# Altium PCB LCC_PCB.PcbDoc (part 1 of 2)
Units mm, origin at the board's own origin, x right, y up, seen from the top; angles counter-clockwise.
Board outline 253 x 208 mm, 4 copper layers (Top Layer, Layer 1, Layer 2, Bottom Layer), stack 0.603 mm thick; 172 components, 110 nets, 492 pads, 79 vias.
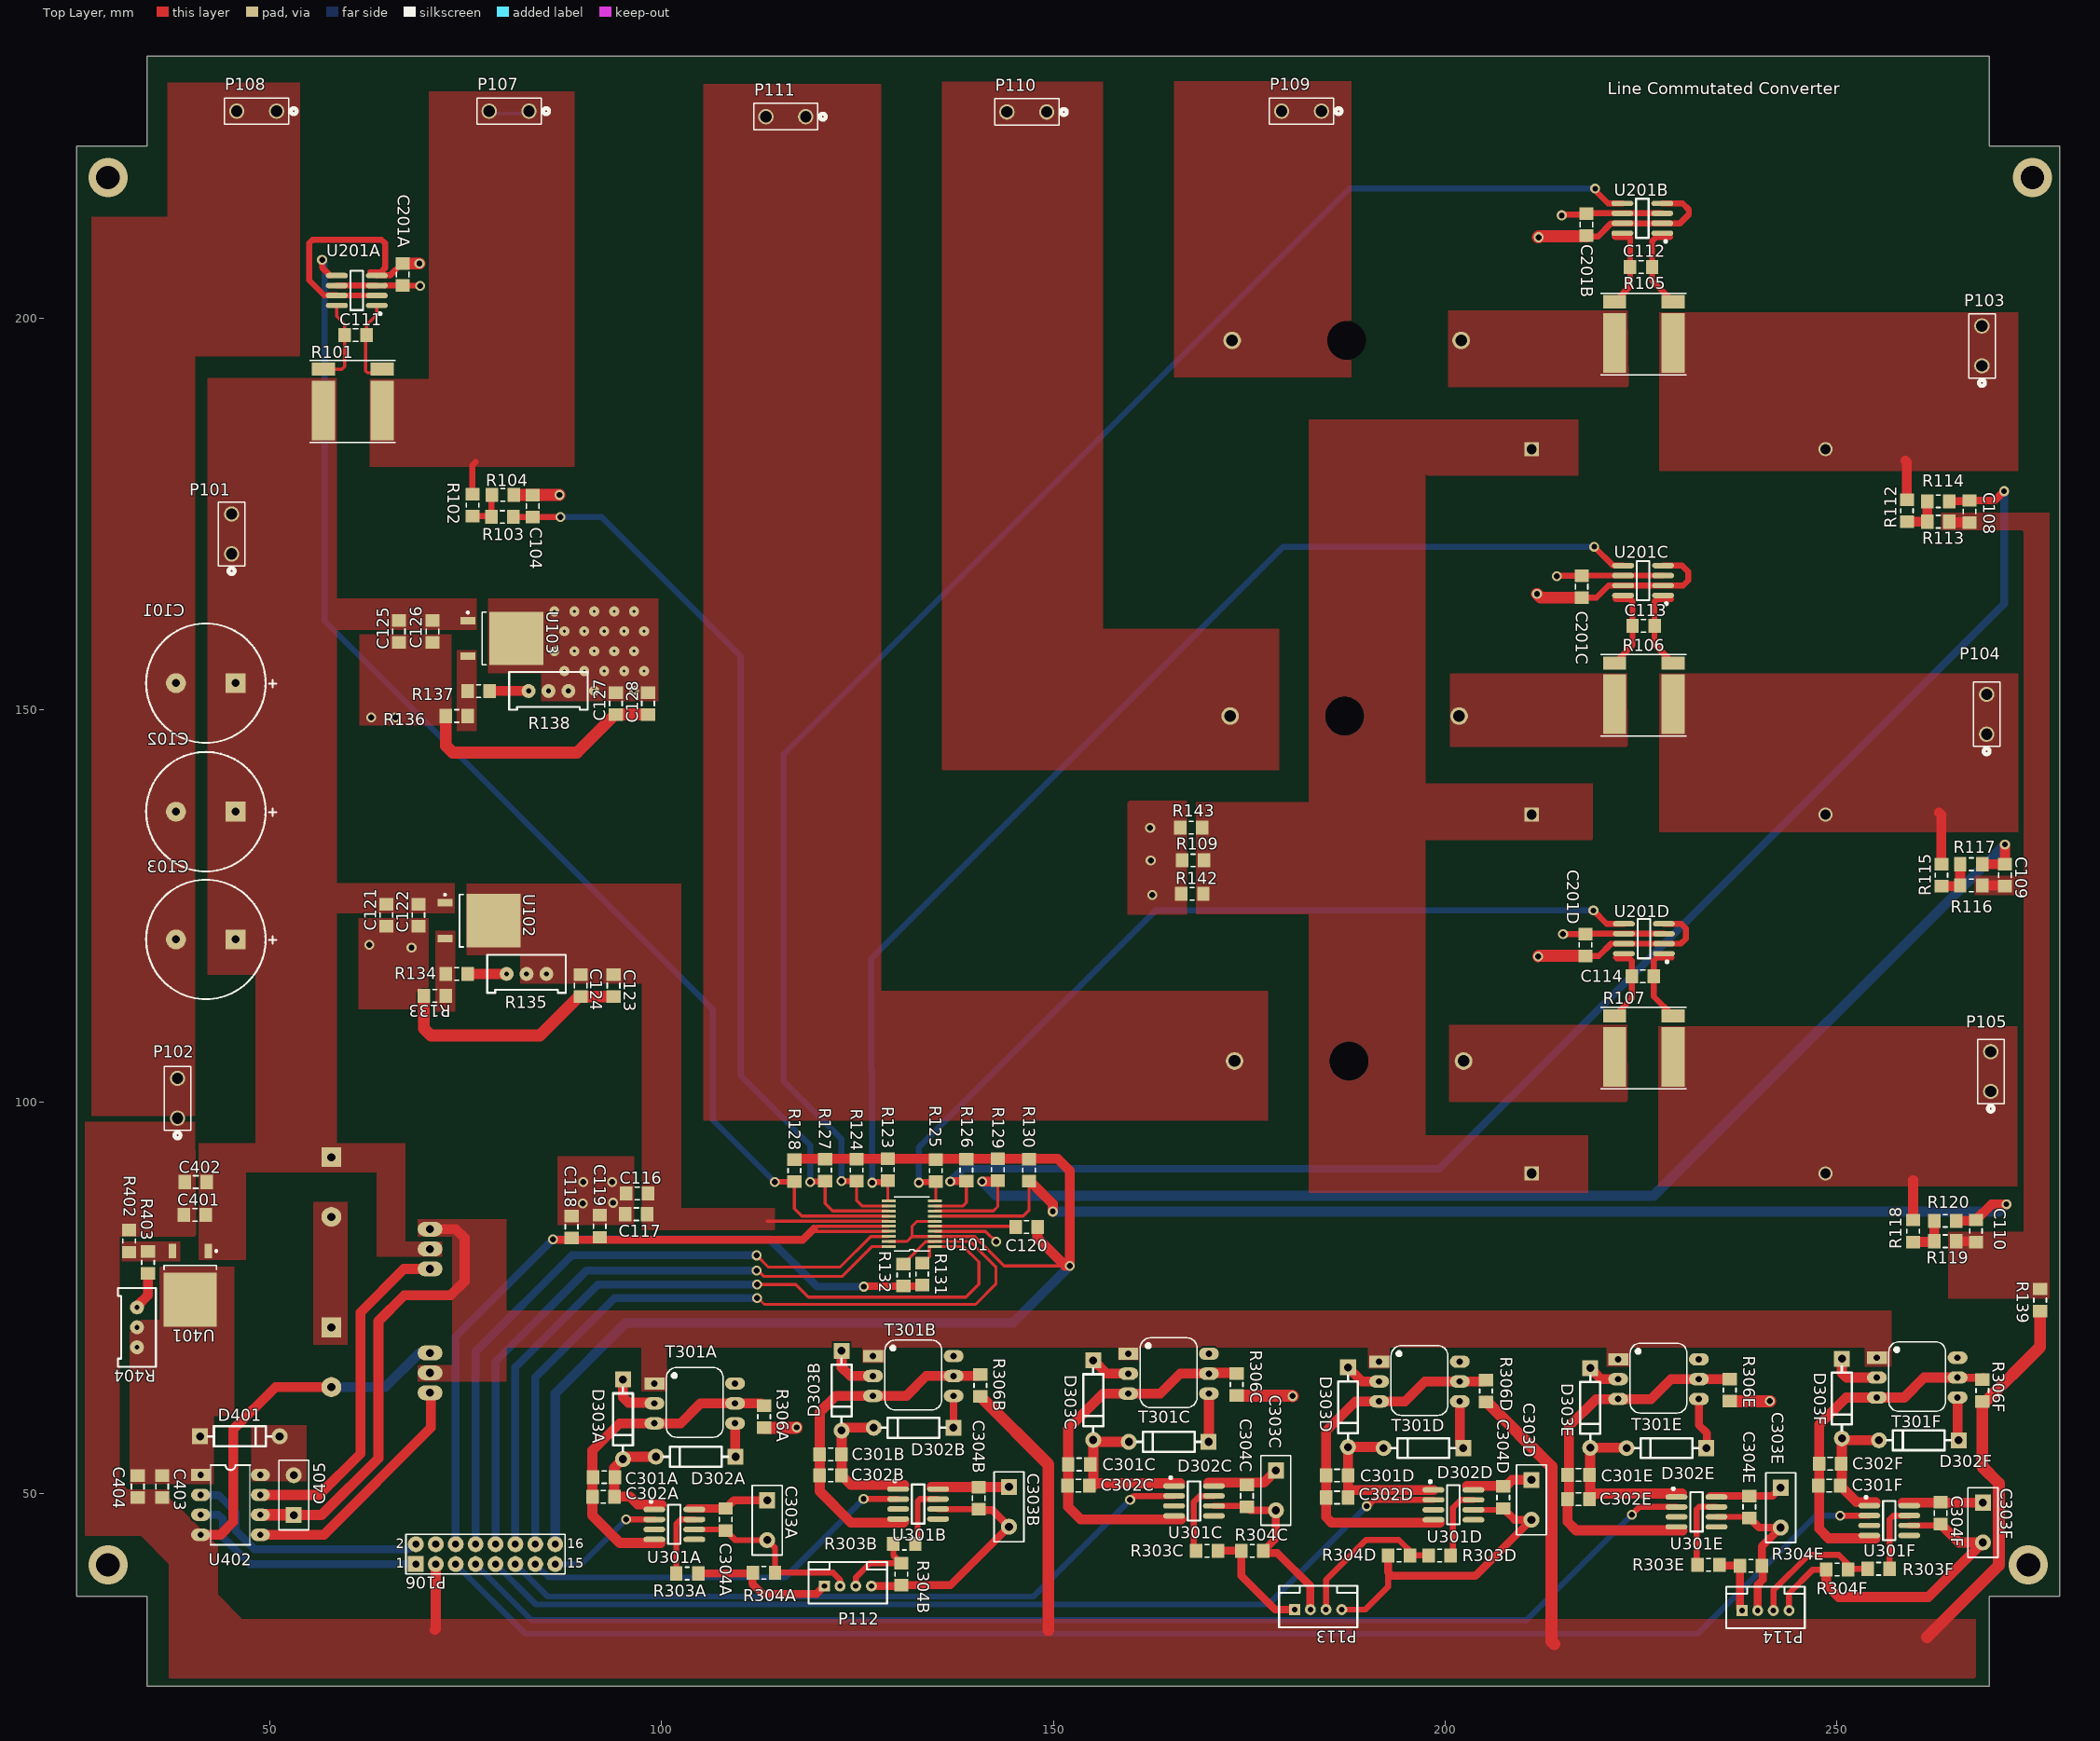
[diagram p0: Top Layer view]
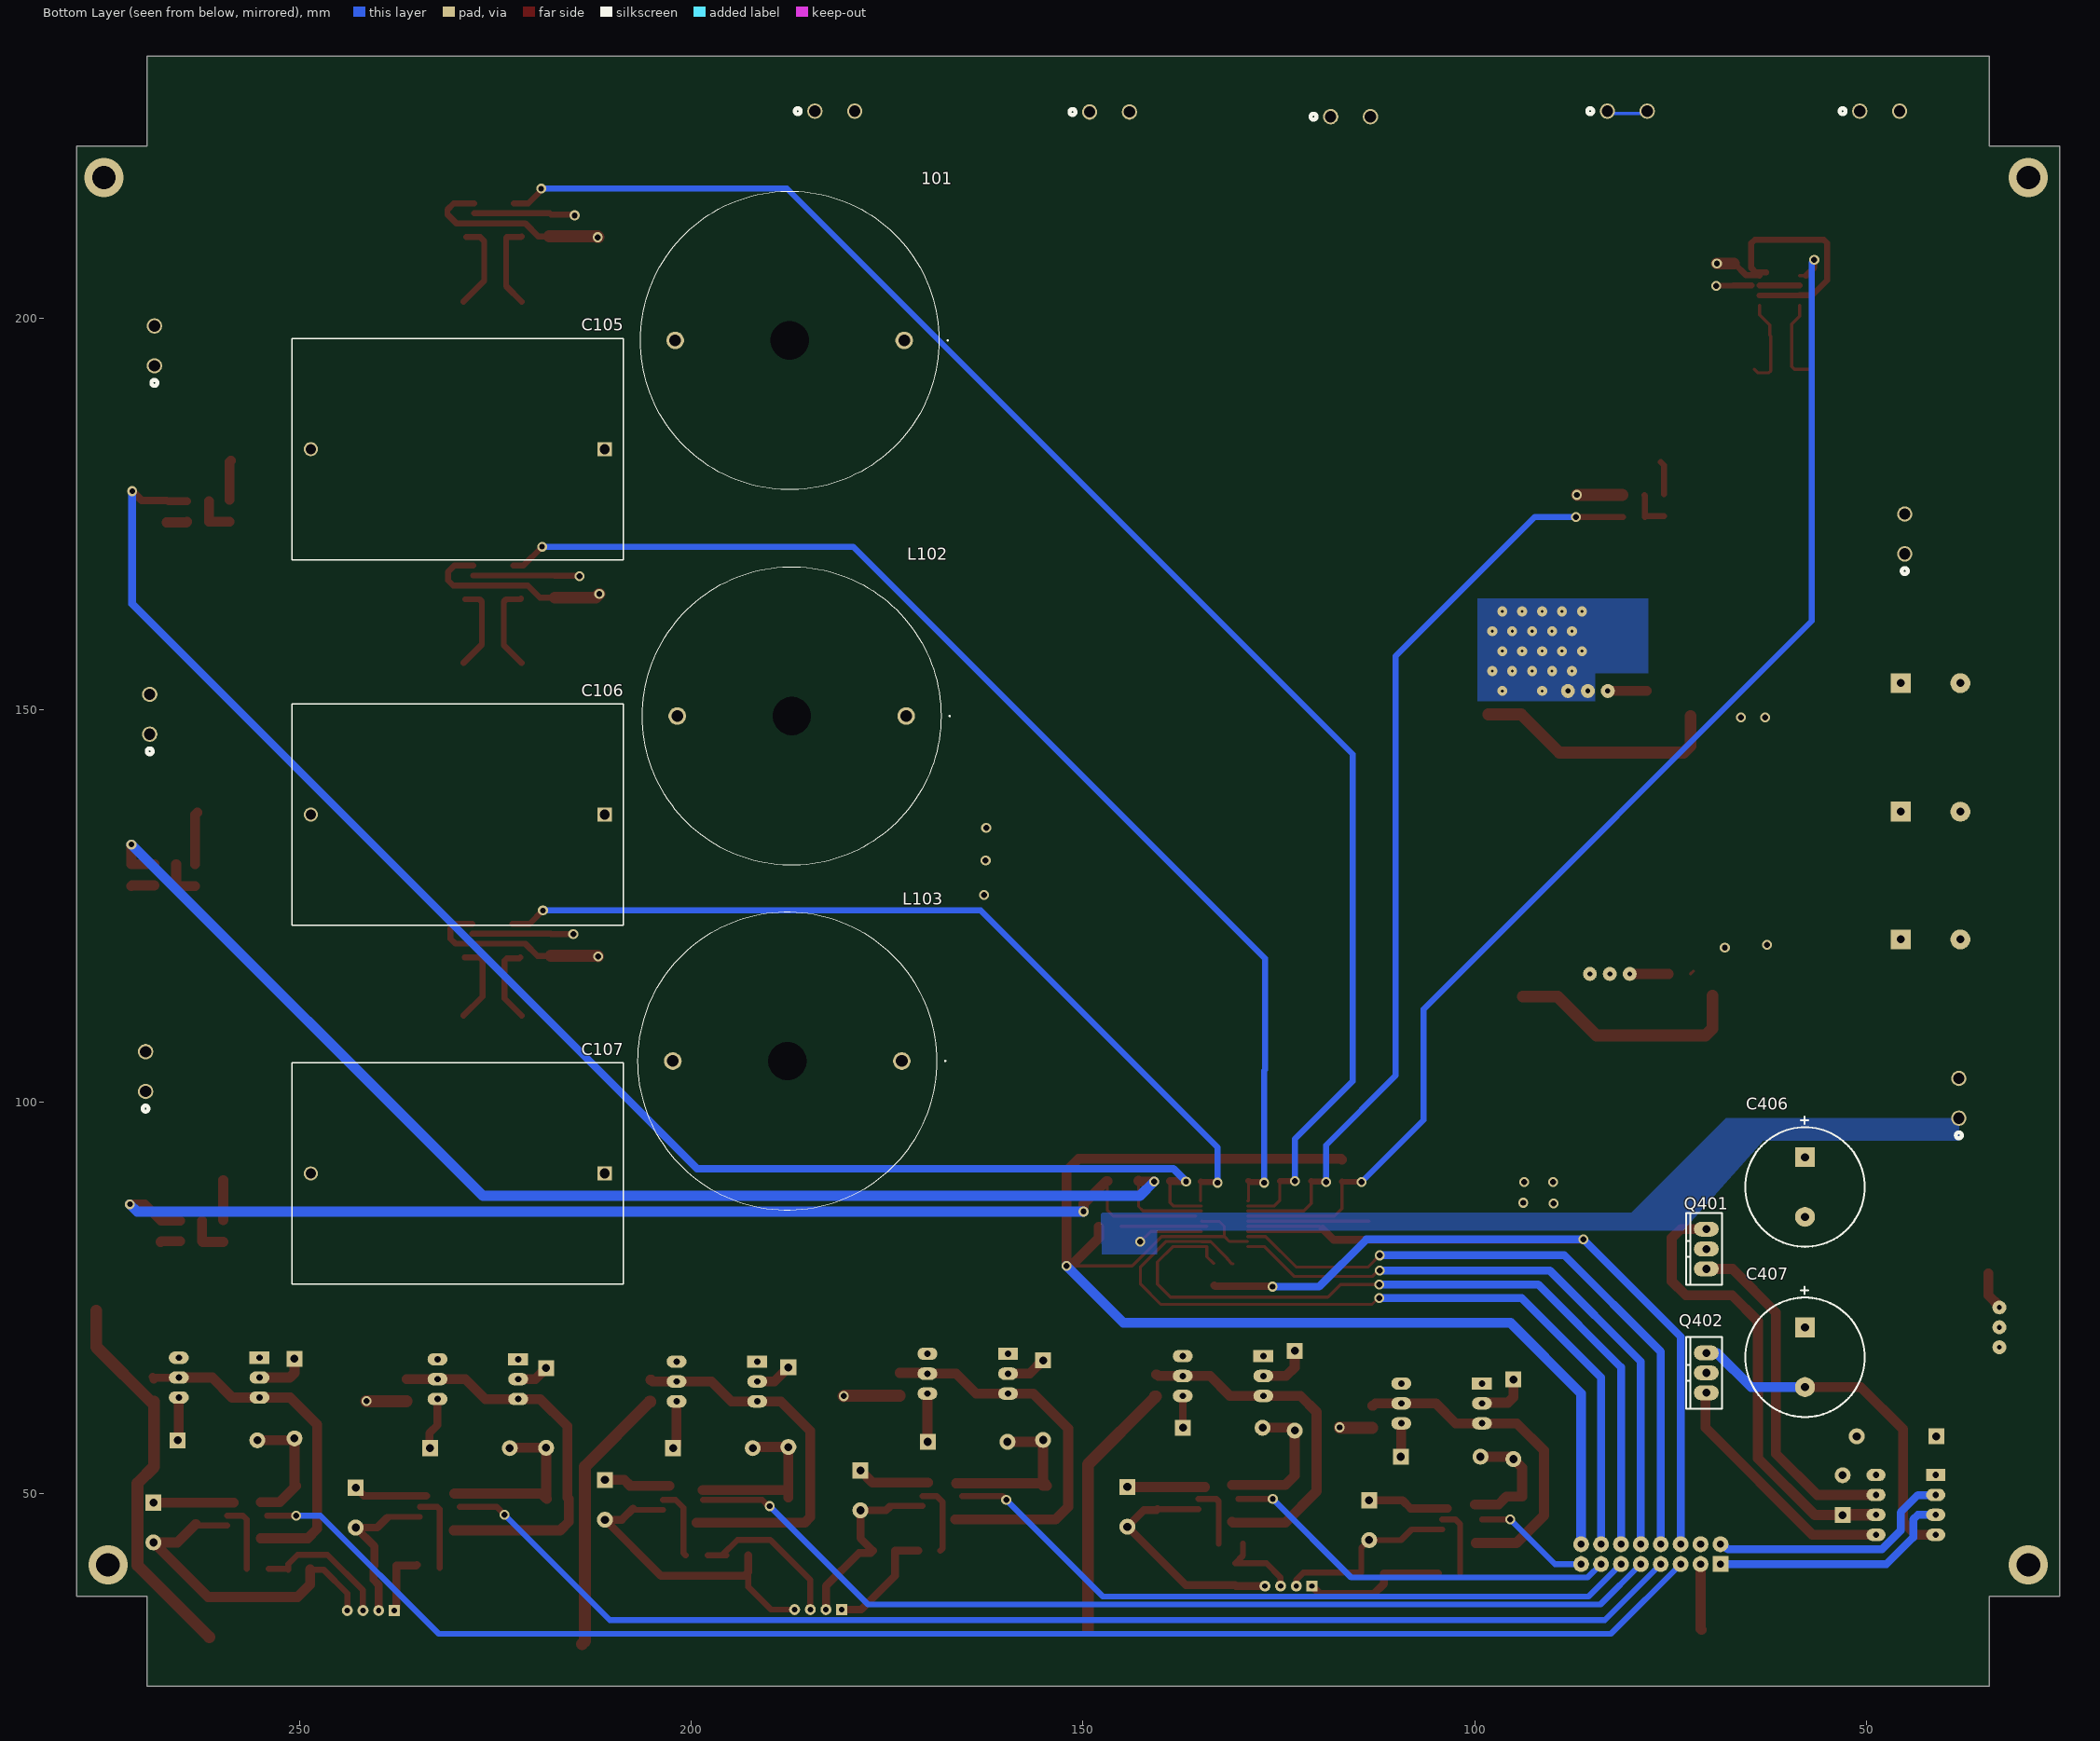
[diagram p1: Bottom Layer view, seen from below]
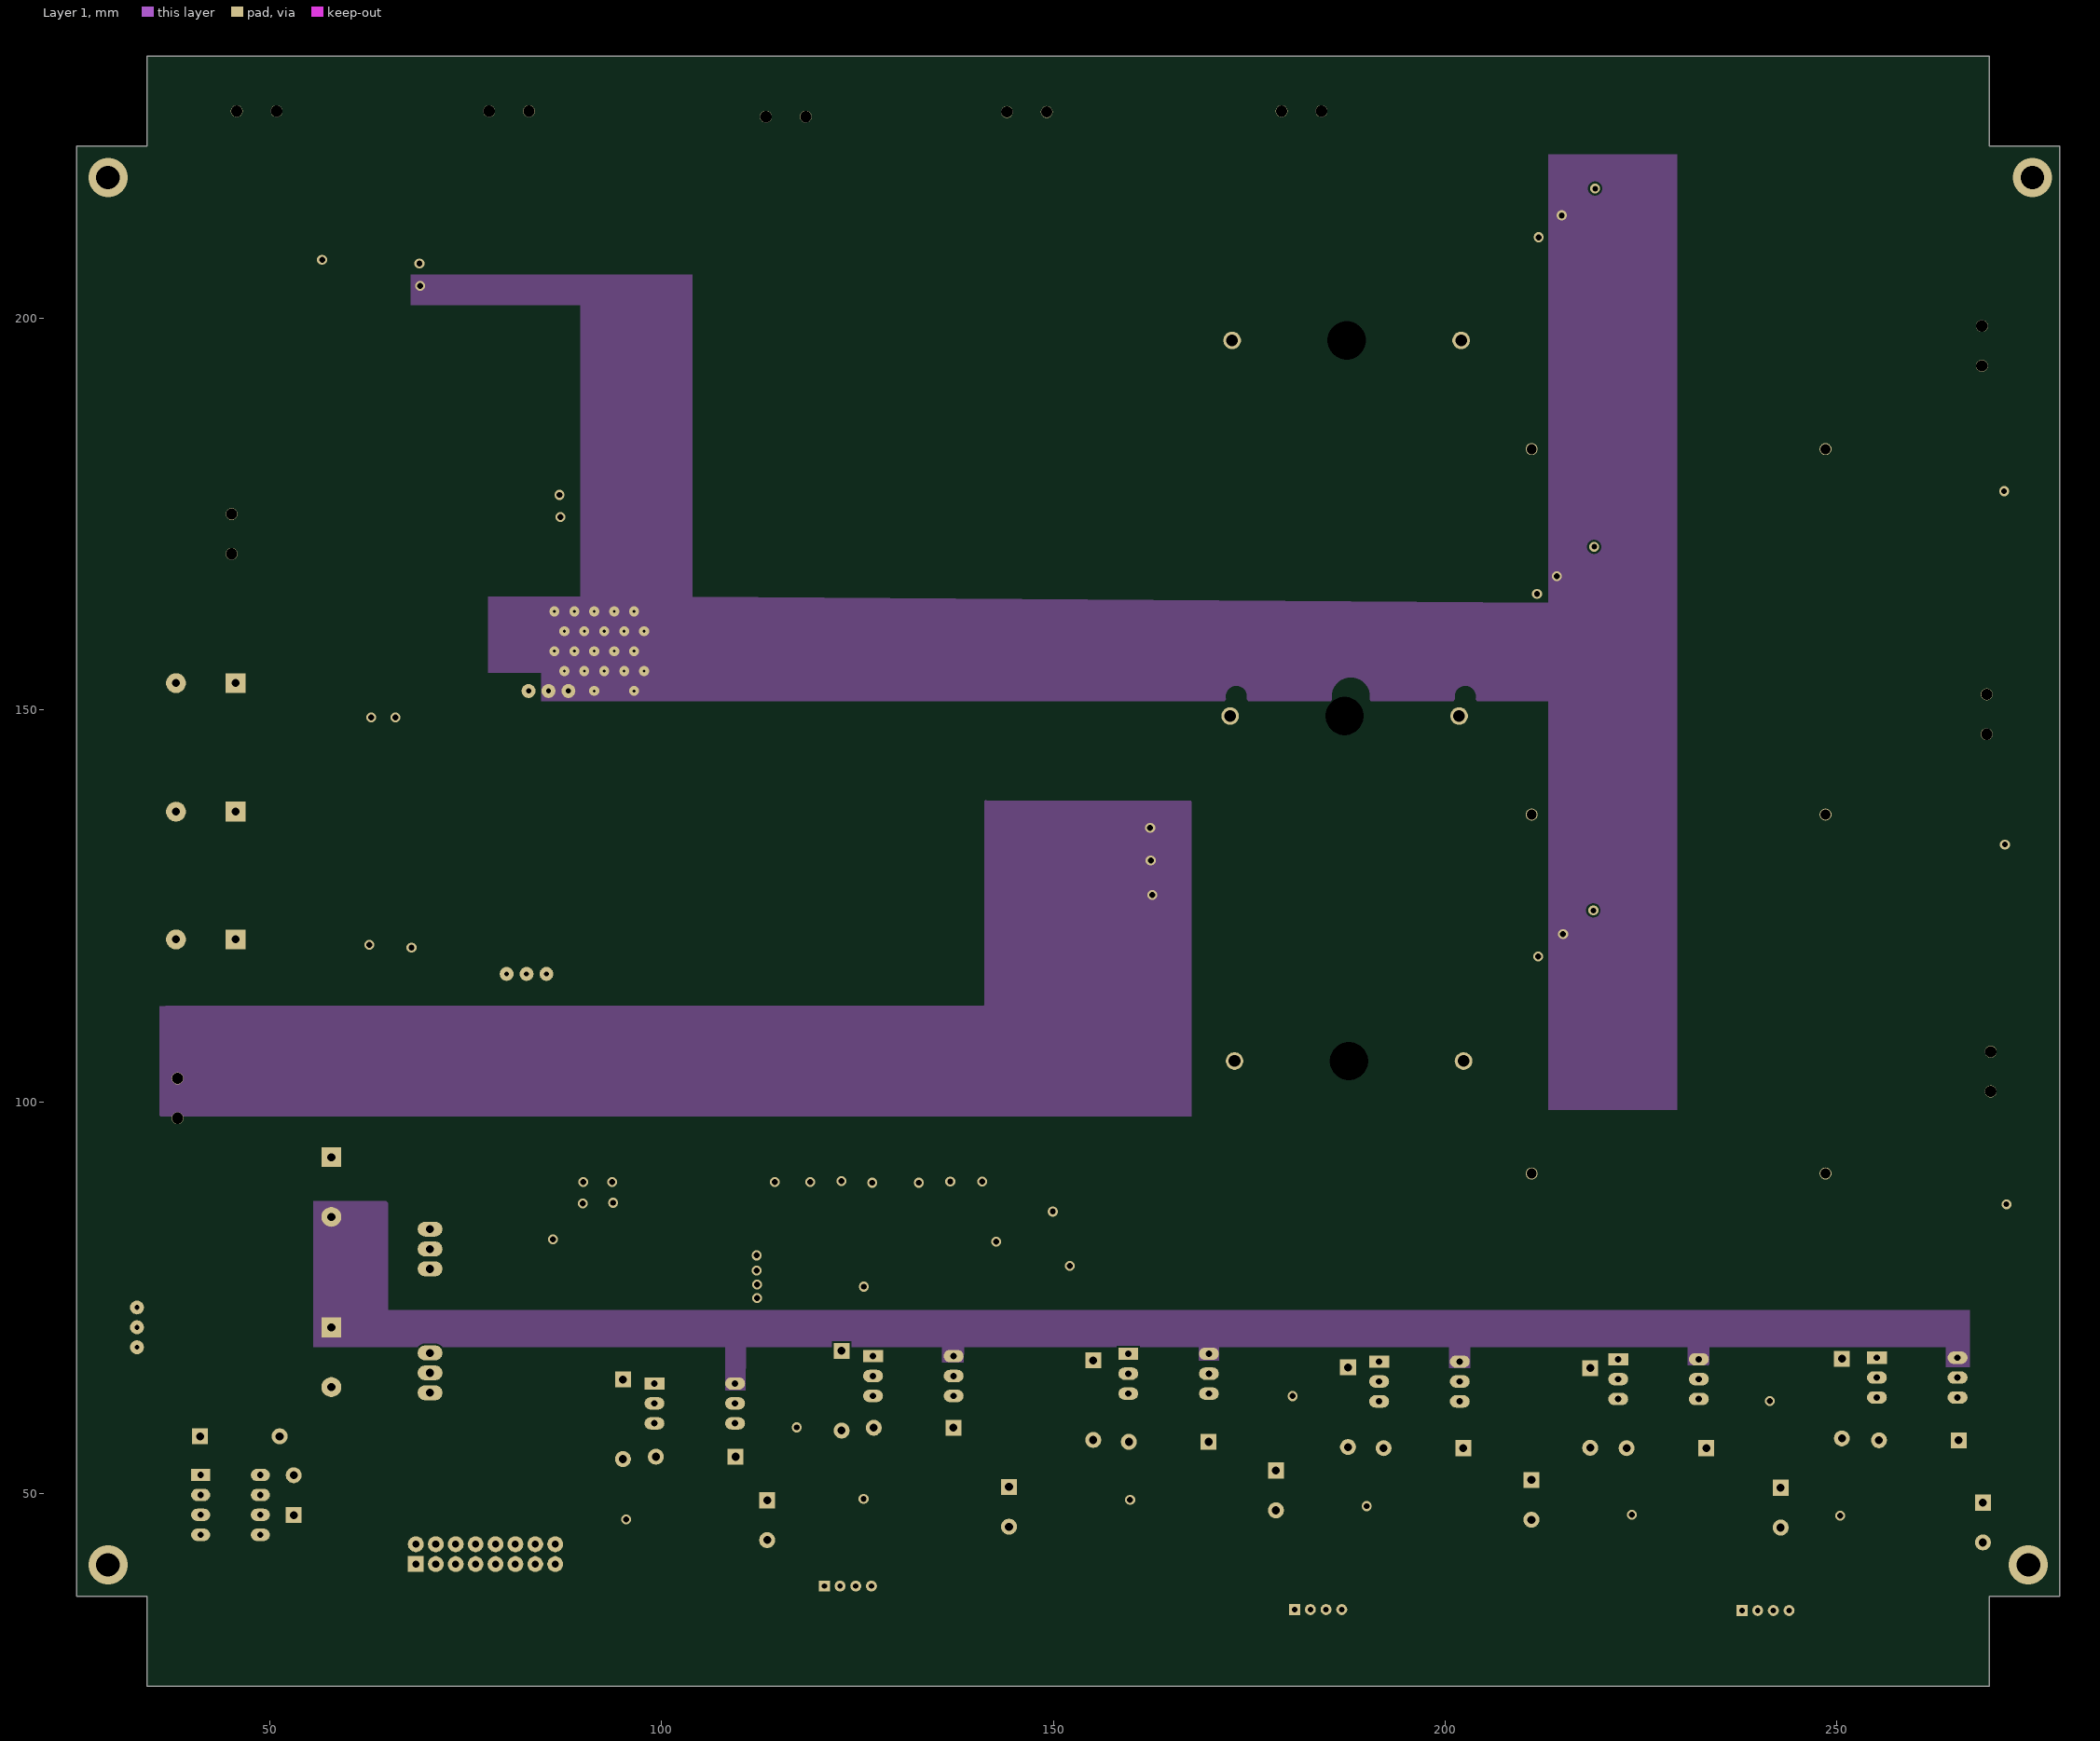
[diagram p2: Layer 1]
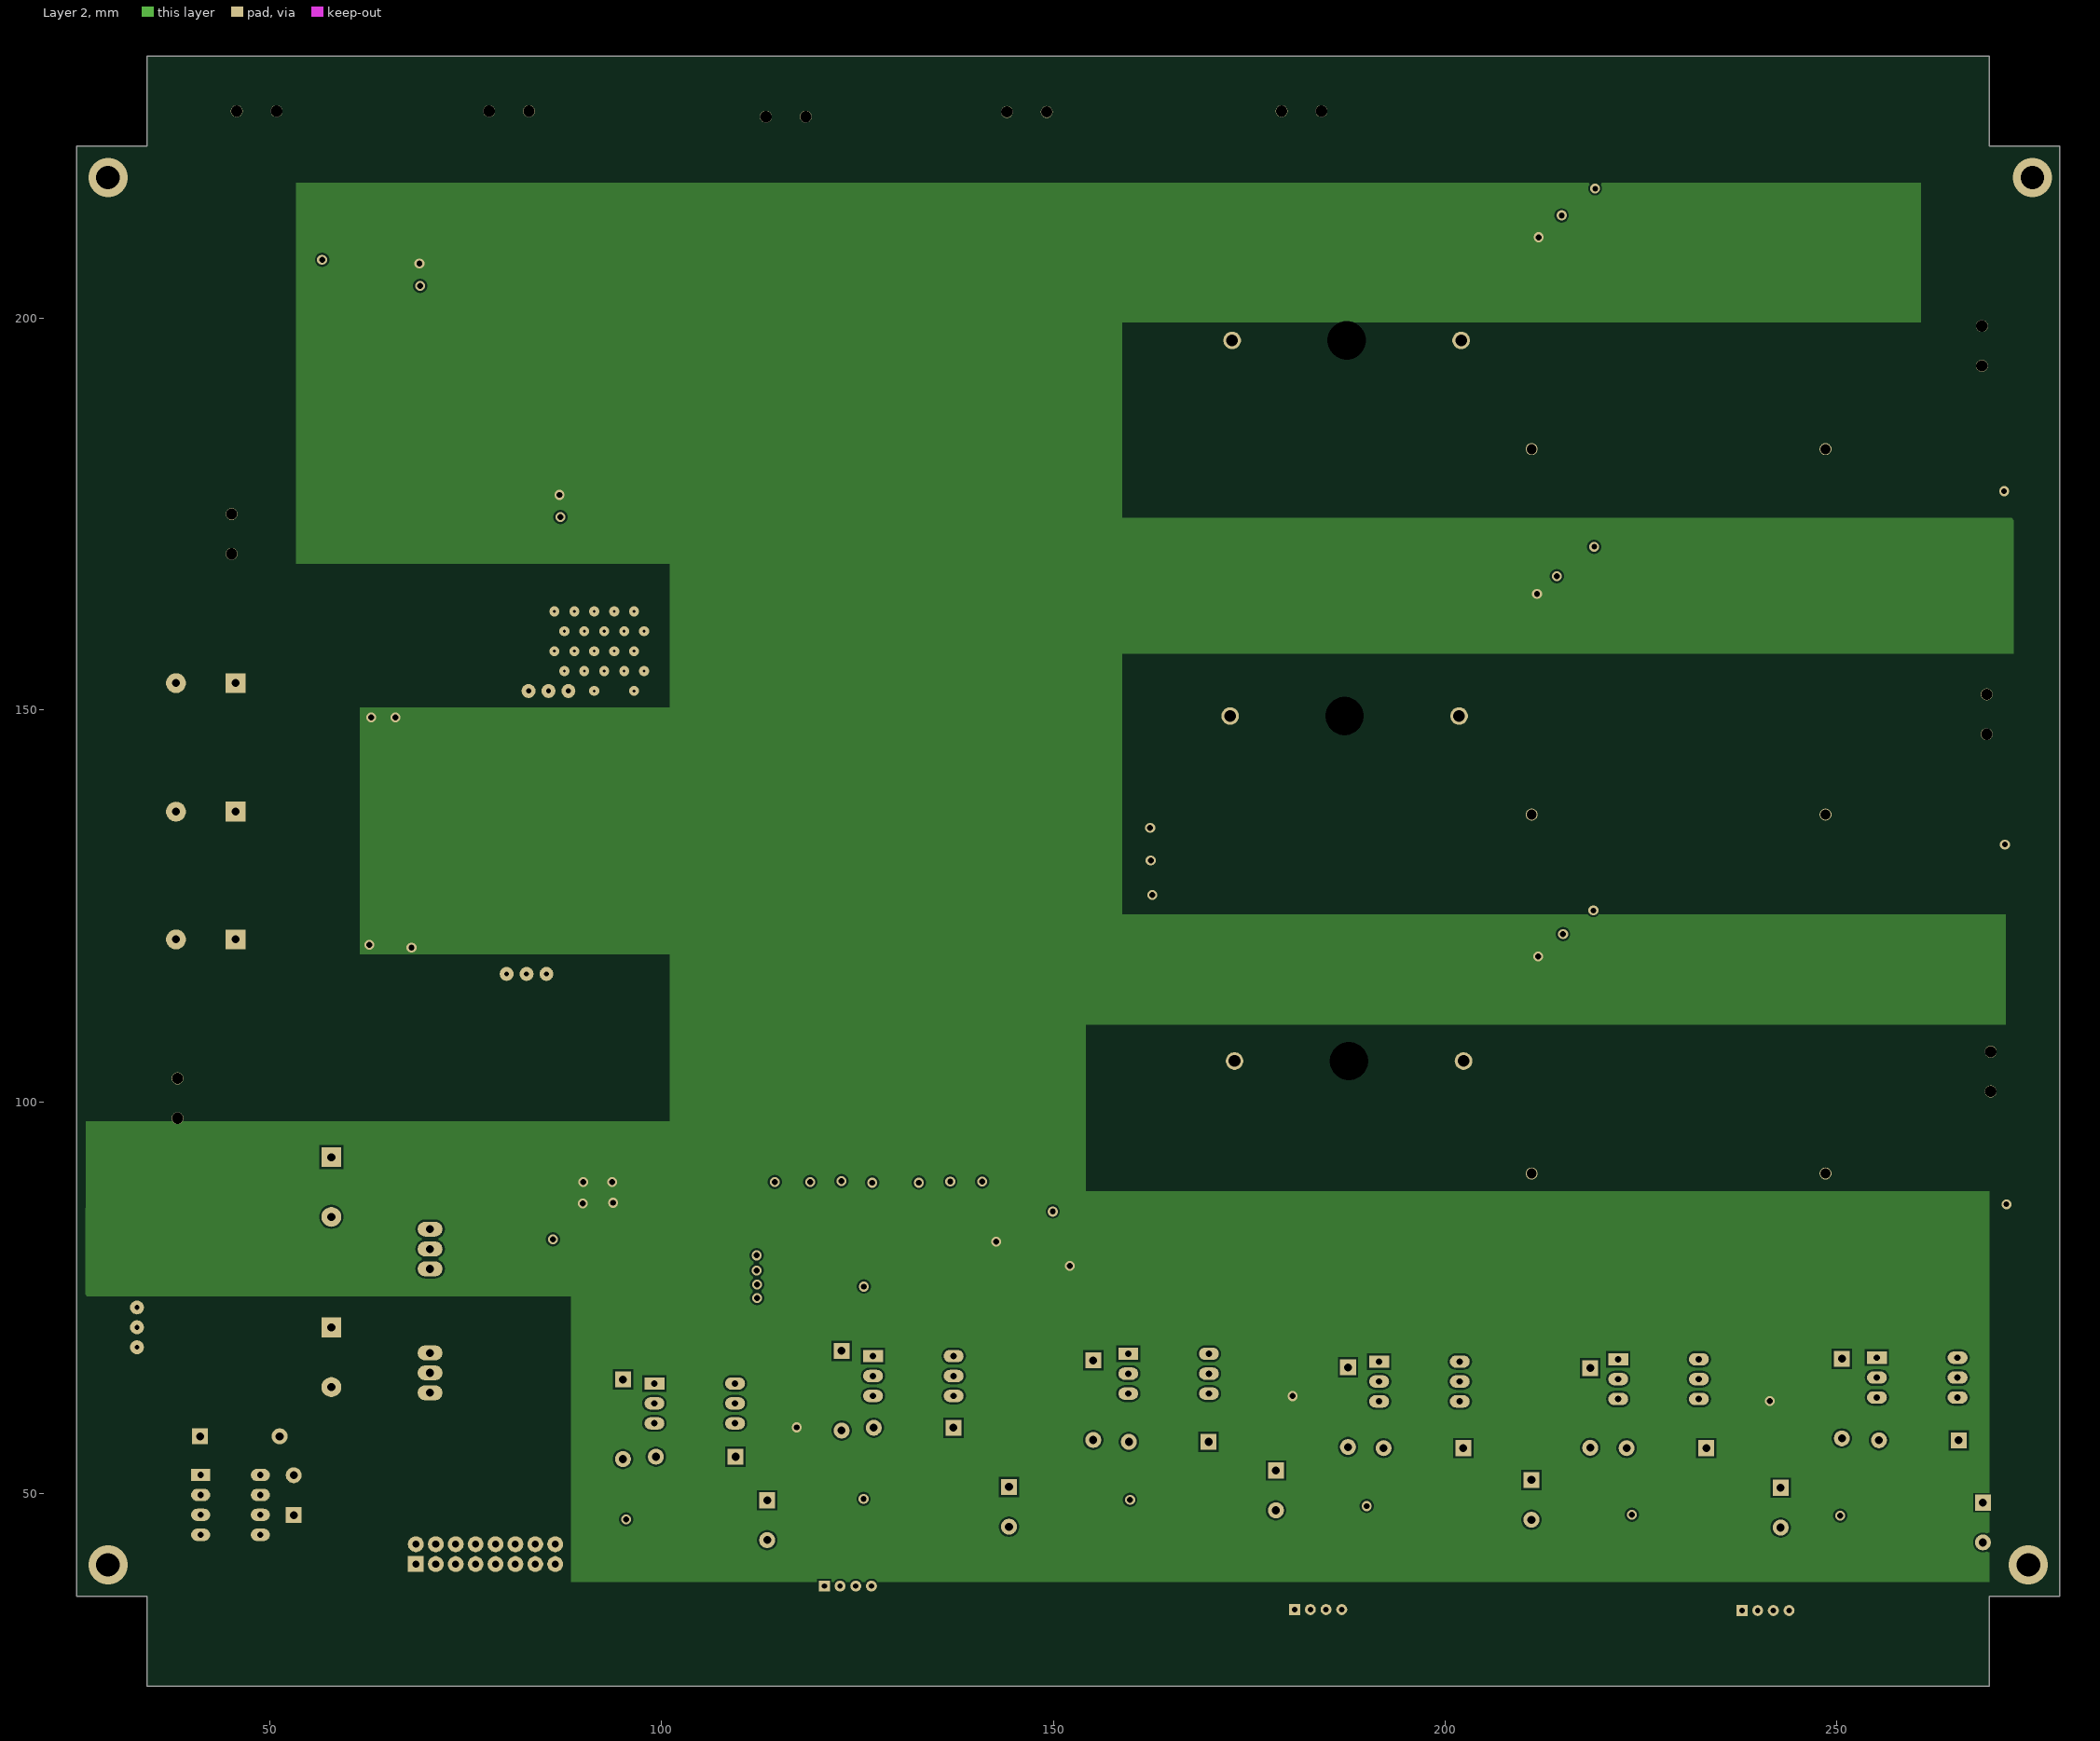
[diagram p3: Layer 2]
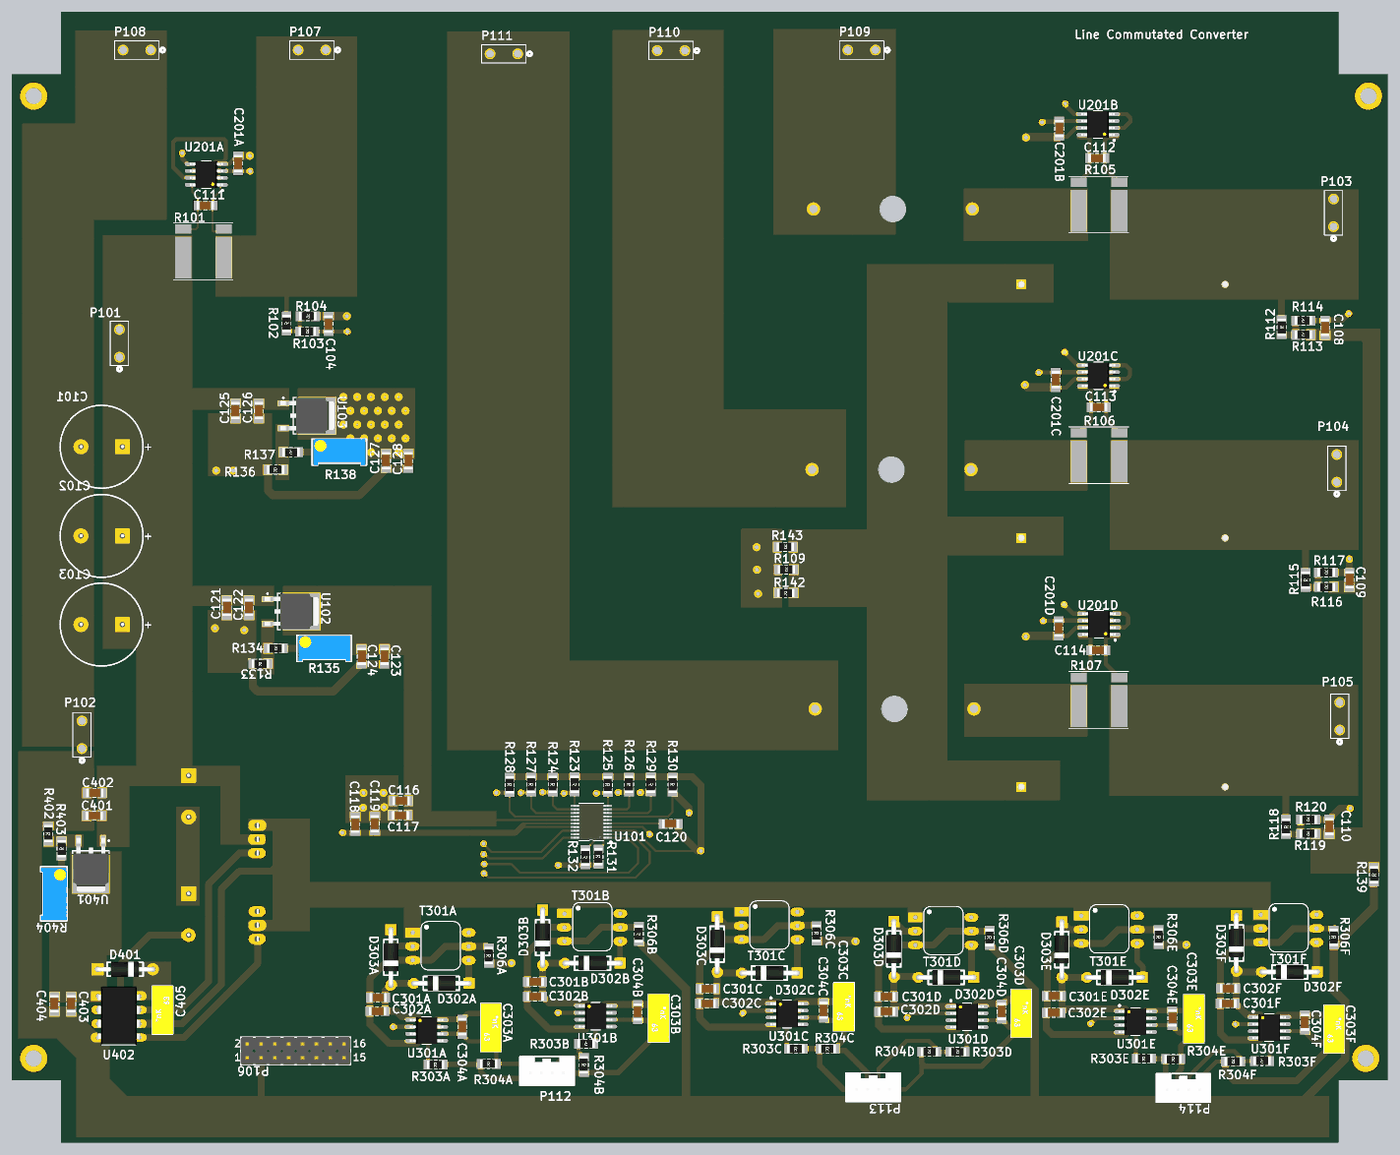
[diagram p5: 3D render of the assembled board from above, using the file's embedded part models]
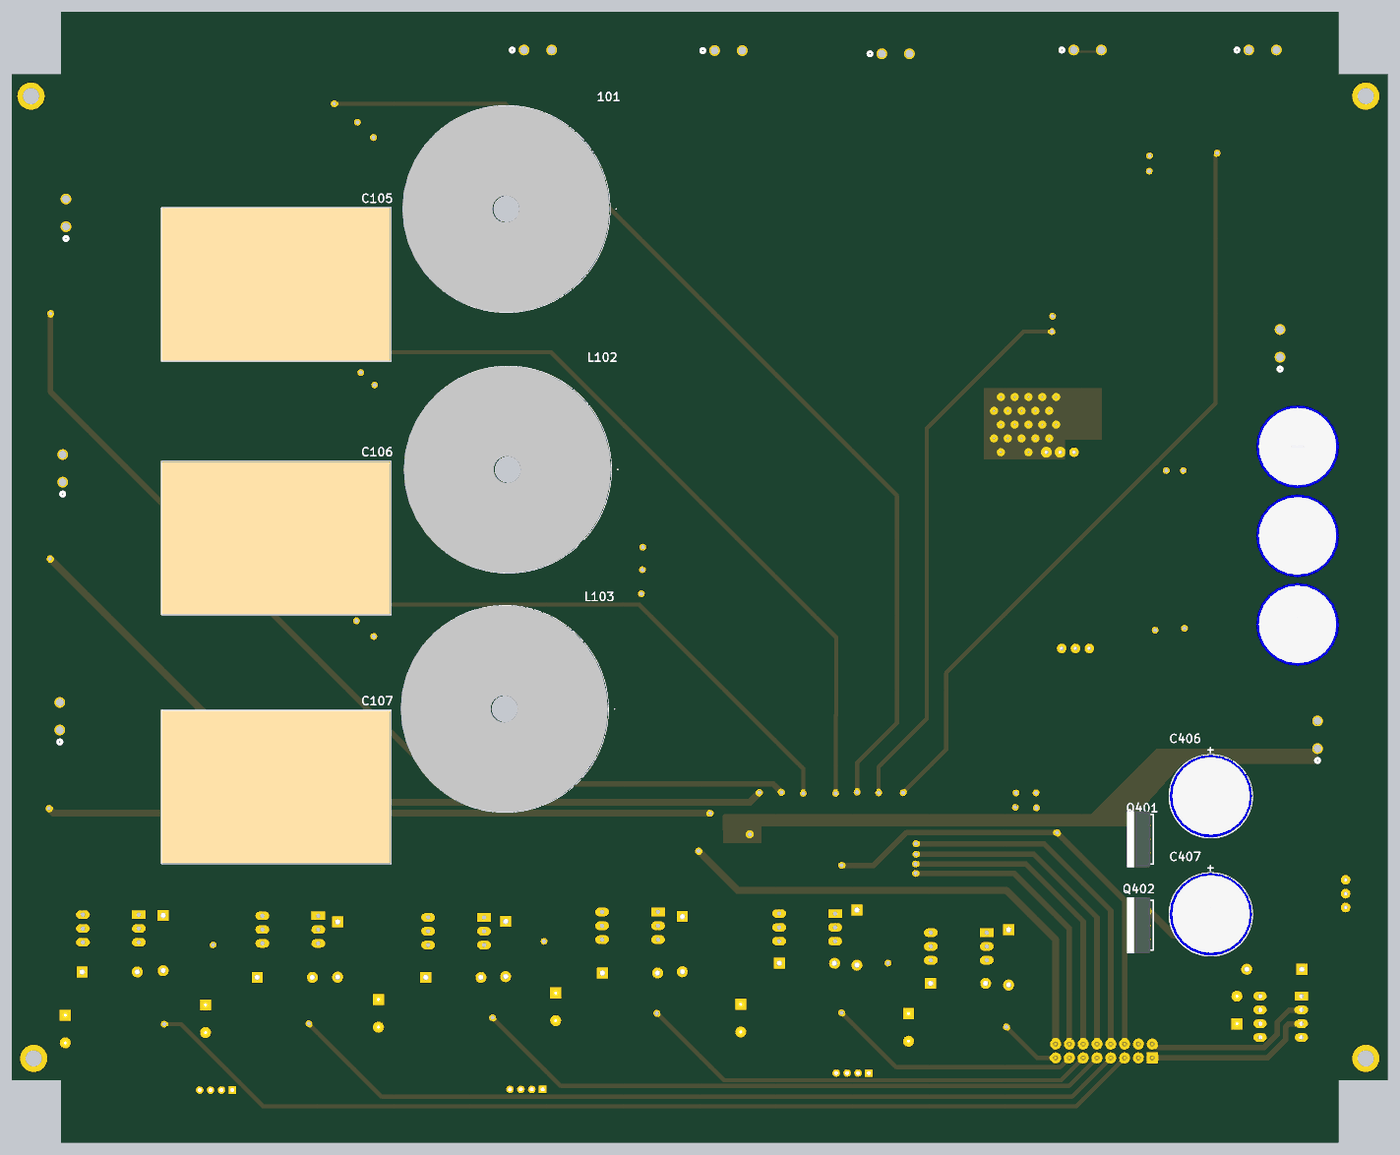
[diagram p6: 3D render of the assembled board from below, using the file's embedded part models]

## Layer stack, top to bottom
Top Solder: solder mask 0.0102, Solder Resist, Dk 3.5
Top Layer: signal copper 0.0356
Dielectric 2: prepreg 0.0711, PP-006, Dk 4.1
Layer 1: signal copper 0.035
Dielectric 1: dielectric 0.32, FR-4, Dk 4.8
Layer 2: signal copper 0.035
Dielectric 3: prepreg 0.0711, PP-006, Dk 4.1
Bottom Layer: signal copper 0.0356
Bottom Solder: solder mask 0.0102, Solder Resist, Dk 3.5

## Board outline
25.4,36.9 34.4,36.9 34.4,25.4 269.4,25.4 269.4,36.9 278.4,36.9 278.4,221.9 269.4,221.9 269.4,233.4 34.4,233.4 34.4,221.9 25.4,221.9

## Design rules (kind name [scope] priority, off if disabled: settings)
Clearance [All] p1: gap=0.254 ignorepadtopadclearanceinfootprint=FALSE except(0: Arc-Hole Track-Hole SMDPad-Hole THPad-Hole Via-Hole Fill-Hole Poly-Hole Region-Hole Text-Hole)
Height [All] p1: minheight=0 maxheight=100 prefheight=10
PolygonConnect PolygonConnect_10 [All vs IsNamedPolygon('+10D_L01_P025') Or IsNamedPolygon('+10_L01_P017') Or IsNamedPolygon('+12_L01_P022') Or IsNamedPolygon('+48_L01_P001') Or IsNamedPolygon('GND_L01_P002') Or IsNamedPolygon('GND_L01_P019') Or IsNamedPolygon('GND_L01_P020') Or IsNamedPolygon('GND_L01_P023') Or IsNamedPolygon('GND_L01_P032') Or IsNamedPolygon('HN_L01_P033') Or IsNamedPolygon('NET101_1_L01_P004') Or IsNamedPolygon('NET101_2_L01_P007') Or IsNamedPolygon('NETC105_1_L01_P031') Or IsNamedPolygon('NETC105_2_L01_P010') Or IsNamedPolygon('NETC106_2_L01_P013') Or IsNamedPolygon('NETC107_2_L01_P012') Or IsNamedPolygon('NETC108_1_L01_P030') Or IsNamedPolygon('NETC405_2_L01_P029') Or IsNamedPolygon('NETC406_2_L01_P015') Or IsNamedPolygon('NETL102_1_L01_P005') Or IsNamedPolygon('NETL102_2_L01_P008') Or IsNamedPolygon('NETL103_1_L01_P014') Or IsNamedPolygon('NETL103_2_L01_P009') Or IsNamedPolygon('NETP107_1_L01_P003') Or IsNamedPolygon('NETR133_2_L01_P021') Or IsNamedPolygon('NETR136_2_L01_P018') Or IsNamedPolygon('NETR402_2_L01_P024') Or IsNamedPolygon('NONET_L-01_P-001') Or IsNamedPolygon('NONET_L-01_P-001') Or IsNamedPolygon('NETC406_2_L02_P034') Or IsNamedPolygon('NONET_L-01_P-001') Or IsNamedPolygon('NONET_L-01_P-001') Or IsNamedPolygon('NONET_L-01_P-001') Or IsNamedPolygon('NONET_L-01_P-001') Or IsNamedPolygon('NONET_L-01_P-001')] p1: connectstyle=Direct reliefconductorwidth=0.254 reliefentries=4 polygonreliefangle="90 Angle" airgapwidth=0.254
PolygonConnect PolygonConnect_9 [All vs IsNamedPolygon('+10D_L01_P025') Or IsNamedPolygon('+10_L01_P017') Or IsNamedPolygon('+12_L01_P022') Or IsNamedPolygon('+48_L01_P001') Or IsNamedPolygon('GND_L01_P002') Or IsNamedPolygon('GND_L01_P019') Or IsNamedPolygon('GND_L01_P020') Or IsNamedPolygon('GND_L01_P023') Or IsNamedPolygon('GND_L01_P032') Or IsNamedPolygon('HN_L01_P033') Or IsNamedPolygon('NETC105_1_L01_P031') Or IsNamedPolygon('NETC105_2_L01_P010') Or IsNamedPolygon('NETC106_2_L01_P013') Or IsNamedPolygon('NETC107_2_L01_P012') Or IsNamedPolygon('NETC108_1_L01_P030') Or IsNamedPolygon('NETC405_2_L01_P029') Or IsNamedPolygon('NETC406_2_L01_P015') Or IsNamedPolygon('NETL101_1_L01_P004') Or IsNamedPolygon('NETL101_2_L01_P007') Or IsNamedPolygon('NETL102_1_L01_P005') Or IsNamedPolygon('NETL102_2_L01_P008') Or IsNamedPolygon('NETL103_1_L01_P014') Or IsNamedPolygon('NETL103_2_L01_P009') Or IsNamedPolygon('NETP107_1_L01_P003') Or IsNamedPolygon('NETR133_2_L01_P021') Or IsNamedPolygon('NETR136_2_L01_P018') Or IsNamedPolygon('NETR402_2_L01_P024') Or IsNamedPolygon('NETC406_2_L02_P034') Or IsNamedPolygon('NONET_L-01_P-001') Or IsNamedPolygon('NONET_L-01_P-001')] p2: connectstyle=Direct reliefconductorwidth=0.254 reliefentries=4 polygonreliefangle="90 Angle" airgapwidth=0.254
PolygonConnect PolygonConnect_8 [All vs IsNamedPolygon('+10D_L01_P025') Or IsNamedPolygon('+10_L01_P017') Or IsNamedPolygon('+12_L01_P022') Or IsNamedPolygon('+48_L01_P001') Or IsNamedPolygon('GND_L01_P002') Or IsNamedPolygon('GND_L01_P019') Or IsNamedPolygon('GND_L01_P020') Or IsNamedPolygon('GND_L01_P023') Or IsNamedPolygon('GND_L01_P032') Or IsNamedPolygon('HN_L01_P033') Or IsNamedPolygon('NETC105_1_L01_P031') Or IsNamedPolygon('NETC105_2_L01_P010') Or IsNamedPolygon('NETC106_2_L01_P013') Or IsNamedPolygon('NETC107_2_L01_P012') Or IsNamedPolygon('NETC108_1_L01_P030') Or IsNamedPolygon('NETC405_2_L01_P029') Or IsNamedPolygon('NETC406_2_L01_P015') Or IsNamedPolygon('NETL101_1_L01_P004') Or IsNamedPolygon('NETL101_2_L01_P007') Or IsNamedPolygon('NETL102_1_L01_P005') Or IsNamedPolygon('NETL102_2_L01_P008') Or IsNamedPolygon('NETL103_1_L01_P014') Or IsNamedPolygon('NETL103_2_L01_P009') Or IsNamedPolygon('NETP107_1_L01_P003') Or IsNamedPolygon('NETR133_2_L01_P021') Or IsNamedPolygon('NETR136_2_L01_P018') Or IsNamedPolygon('NETR402_2_L01_P024') Or IsNamedPolygon('NETC406_2_L02_P034')] p3: connectstyle=Direct reliefconductorwidth=0.254 reliefentries=4 polygonreliefangle="90 Angle" airgapwidth=0.254
PolygonConnect PolygonConnect_7 [All vs IsNamedPolygon('+10D_L01_P025') Or IsNamedPolygon('+10_L01_P017') Or IsNamedPolygon('+12_L01_P022') Or IsNamedPolygon('+48_L01_P001') Or IsNamedPolygon('GND_L01_P002') Or IsNamedPolygon('GND_L01_P019') Or IsNamedPolygon('GND_L01_P020') Or IsNamedPolygon('GND_L01_P023') Or IsNamedPolygon('GND_L01_P026') Or IsNamedPolygon('HN_L01_P027') Or IsNamedPolygon('NETC105_1_L01_P031') Or IsNamedPolygon('NETC105_2_L01_P010') Or IsNamedPolygon('NETC106_2_L01_P013') Or IsNamedPolygon('NETC107_2_L01_P012') Or IsNamedPolygon('NETC108_1_L01_P030') Or IsNamedPolygon('NETC405_2_L01_P029') Or IsNamedPolygon('NETC406_2_L01_P015') Or IsNamedPolygon('NETL101_1_L01_P004') Or IsNamedPolygon('NETL101_2_L01_P007') Or IsNamedPolygon('NETL102_1_L01_P005') Or IsNamedPolygon('NETL102_2_L01_P008') Or IsNamedPolygon('NETL103_1_L01_P014') Or IsNamedPolygon('NETL103_2_L01_P009') Or IsNamedPolygon('NETP107_1_L01_P003') Or IsNamedPolygon('NETR133_2_L01_P021') Or IsNamedPolygon('NETR136_2_L01_P018') Or IsNamedPolygon('NETR402_2_L01_P024')] p4: connectstyle=Direct reliefconductorwidth=0.254 reliefentries=4 polygonreliefangle="90 Angle" airgapwidth=0.254
PolygonConnect PolygonConnect_6 [All vs IsNamedPolygon('+10D_L01_P025') Or IsNamedPolygon('+10_L01_P017') Or IsNamedPolygon('+12_L01_P022') Or IsNamedPolygon('+48_L01_P001') Or IsNamedPolygon('GND_L01_P002') Or IsNamedPolygon('GND_L01_P019') Or IsNamedPolygon('GND_L01_P020') Or IsNamedPolygon('GND_L01_P023') Or IsNamedPolygon('GND_L01_P026') Or IsNamedPolygon('HN_L01_P027') Or IsNamedPolygon('NETC105_2_L01_P010') Or IsNamedPolygon('NETC107_2_L01_P012') Or IsNamedPolygon('NETC106_2_L01_P013') Or IsNamedPolygon('NETC406_2_L01_P015') Or IsNamedPolygon('NETL101_2_L01_P007') Or IsNamedPolygon('NETL102_2_L01_P008') Or IsNamedPolygon('NETL103_2_L01_P009') Or IsNamedPolygon('NETP107_1_L01_P003') Or IsNamedPolygon('NETR133_2_L01_P021') Or IsNamedPolygon('NETR136_2_L01_P018') Or IsNamedPolygon('NETR402_2_L01_P024') Or IsNamedPolygon('NETL101_1_L01_P004') Or IsNamedPolygon('NETL102_1_L01_P005') Or IsNamedPolygon('NETL103_1_L01_P014')] p5: connectstyle=Direct reliefconductorwidth=0.254 reliefentries=4 polygonreliefangle="90 Angle" airgapwidth=0.254
PolygonConnect PolygonConnect_5 [All vs IsNamedPolygon('NETL101_1_L01_P004') Or IsNamedPolygon('NETL102_1_L01_P005') Or IsNamedPolygon('NETL103_1_L01_P014')] p6: connectstyle=Direct reliefconductorwidth=0.254 reliefentries=4 polygonreliefangle="90 Angle" airgapwidth=0.254
PolygonConnect PolygonConnect_4 [All vs IsNamedPolygon('+10D_L01_P025') Or IsNamedPolygon('+10_L01_P017') Or IsNamedPolygon('+12_L01_P022') Or IsNamedPolygon('+48_L01_P001') Or IsNamedPolygon('GND_L01_P002') Or IsNamedPolygon('GND_L01_P019') Or IsNamedPolygon('GND_L01_P020') Or IsNamedPolygon('GND_L01_P023') Or IsNamedPolygon('NETC105_2_L01_P010') Or IsNamedPolygon('NETC107_2_L01_P012') Or IsNamedPolygon('NETC106_2_L01_P013') Or IsNamedPolygon('NETC406_2_L01_P015') Or IsNamedPolygon('NETL101_2_L01_P007') Or IsNamedPolygon('NETL102_2_L01_P008') Or IsNamedPolygon('NETL103_2_L01_P009') Or IsNamedPolygon('NETP107_1_L01_P003') Or IsNamedPolygon('NETR133_2_L01_P021') Or IsNamedPolygon('NETR136_2_L01_P018') Or IsNamedPolygon('NETR402_2_L01_P024')] p7: connectstyle=Direct reliefconductorwidth=0.254 reliefentries=4 polygonreliefangle="90 Angle" airgapwidth=0.254
PolygonConnect PolygonConnect_3 [All vs IsNamedPolygon('+10D_L01_P025') Or IsNamedPolygon('+10_L01_P017') Or IsNamedPolygon('+12_L01_P022') Or IsNamedPolygon('+48_L01_P001') Or IsNamedPolygon('GND_L01_P002') Or IsNamedPolygon('GND_L01_P019') Or IsNamedPolygon('GND_L01_P020') Or IsNamedPolygon('GND_L01_P023') Or IsNamedPolygon('NETC105_2_L01_P010') Or IsNamedPolygon('NETC107_2_L01_P012') Or IsNamedPolygon('NETC106_2_L01_P013') Or IsNamedPolygon('NETC406_2_L01_P015') Or IsNamedPolygon('NETL101_2_L01_P007') Or IsNamedPolygon('NETL102_2_L01_P008') Or IsNamedPolygon('NETL103_2_L01_P009') Or IsNamedPolygon('NETP107_1_L01_P003') Or IsNamedPolygon('NETR133_2_L01_P021') Or IsNamedPolygon('NETR136_2_L01_P018') Or IsNamedPolygon('NETR402_2_L01_P024') Or IsNamedPolygon('NETL101_1_L01_P004') Or IsNamedPolygon('NETL102_1_L01_P005') Or IsNamedPolygon('NETL103_1_L01_P014')] p8: connectstyle=Direct reliefconductorwidth=0.254 reliefentries=4 polygonreliefangle="90 Angle" airgapwidth=0.254
PolygonConnect PolygonConnect_2 [All vs IsNamedPolygon('+10D_L01_P025') Or IsNamedPolygon('+10_L01_P017') Or IsNamedPolygon('+12_L01_P022') Or IsNamedPolygon('+48_L01_P001') Or IsNamedPolygon('GND_L01_P002') Or IsNamedPolygon('GND_L01_P019') Or IsNamedPolygon('GND_L01_P020') Or IsNamedPolygon('GND_L01_P023') Or IsNamedPolygon('NETC105_2_L01_P010') Or IsNamedPolygon('NETC107_2_L01_P012') Or IsNamedPolygon('NETC106_2_L01_P013') Or IsNamedPolygon('NETC406_2_L01_P015') Or IsNamedPolygon('NETL101_2_L01_P007') Or IsNamedPolygon('NETL102_2_L01_P008') Or IsNamedPolygon('NETL103_2_L01_P009') Or IsNamedPolygon('NETP107_1_L01_P003') Or IsNamedPolygon('NETR133_2_L01_P021') Or IsNamedPolygon('NETR136_2_L01_P018') Or IsNamedPolygon('NETR402_2_L01_P024') Or IsNamedPolygon('NETL101_1_L01_P004') Or IsNamedPolygon('NETL102_1_L01_P005') Or IsNamedPolygon('NETL103_1_L01_P014')] p9: connectstyle=Direct reliefconductorwidth=0.254 reliefentries=4 polygonreliefangle="90 Angle" airgapwidth=0.254
PolygonConnect PolygonConnect_1 [All vs IsNamedPolygon('+10_L01_P000')] p10: connectstyle=Direct reliefconductorwidth=0.254 reliefentries=4 polygonreliefangle="90 Angle" airgapwidth=0.254
PolygonConnect [All] p11: connectstyle=Relief reliefconductorwidth=0.254 reliefentries=4 polygonreliefangle="90 Angle" airgapwidth=0.254
RoutingVias [All] p1: holewidth=0.711 width=1.27 viastyle="Through Hole" minholewidth=0.711 minwidth=1.27 maxholewidth=0.711 maxwidth=1.27
SolderMaskExpansion [All] p1: expansion=0.102 istentingtop=FALSE
SupplyNets "Schematic Supply Nets_10" [InNet('GND')] p1: voltage=0.000
SupplyNets "Schematic Supply Nets_8" [InNet('+10')] p2: voltage=0.000
SupplyNets "Schematic Supply Nets_6" [InNet('+48')] p3: voltage=0.000
SupplyNets "Schematic Supply Nets_4" [InNet('+12')] p4: voltage=0.000
SupplyNets "Schematic Supply Nets_3" [InNet('+3V3')] p5: voltage=0.000
SupplyNets "Schematic Supply Nets" [InNet('+10D')] p6: voltage=0.000
Width [All] p1: maxlimit=10 minlimit=0.254 preferedwidth=0.381 midlayer1_maxwidth=0.254 midlayer2_maxwidth=0.254 minimp=50.000000 maximp=50.000000 favimp=50.000000
29 further rules are at their usual default settings.

## Classes and differential pairs
channel class GateDriver: GateDriver1 GateDriver2 GateDriver3 GateDriver4 GateDriver5 GateDriver6
channel class Current_Sensor: Current_Sensor1 Current_Sensor2 Current_Sensor3 Current_Sensor4
component class Pulse_generator: C401 C402 C403 C404 C405 C406 C407 D401 Q401 Q402 R402 R403 R404 U401 U402
component class main: 101 C101 C102 C103 C104 C105 C106 C107 C108 C109 C110 C111 C112 C113 C114 C116 C117 C118 C119 C120 C121 C122 C123 C124 C125 C126 C127 C128 L102 L103 P101 P102 P103 P104 P105 P106 P107 P108 P109 P110 P111 P112 P113 P114 R101 R102 R103 R104 R105 R106 R107 R109 R112 R113 R114 R115 R116 R117 R118 R119 R120 R123 R124 R125 R126 R127 R128 R129 R130 R131 R132 R133 R134 R135 R136 R137 R138 R139 R142 R143 U101 U102 U103
component class GateDriver6: C301F C302F C303F C304F D302F D303F R303F R304F R306F T301F U301F
component class GateDriver5: C301E C302E C303E C304E D302E D303E R303E R304E R306E T301E U301E
component class GateDriver4: C301D C302D C303D C304D D302D D303D R303D R304D R306D T301D U301D
component class GateDriver3: C301C C302C C303C C304C D302C D303C R303C R304C R306C T301C U301C
component class GateDriver2: C301B C302B C303B C304B D302B D303B R303B R304B R306B T301B U301B
component class GateDriver1: C301A C302A C303A C304A D302A D303A R303A R304A R306A T301A U301A
component class Current_Sensor4: C201D U201D
component class Current_Sensor3: C201C U201C
component class Current_Sensor2: C201B U201B
component class Current_Sensor1: C201A U201A

## Components (designator, comment, footprint, x,y, rotation, side; value= is the part's Value field where it differs from the comment)
101 "330u" 1140-331K-RC 187.427,197.129 r0 bottom
C101 "330U" CAPP300-600_AUT 45.7,153.4 r0 top
C102 "330U" CAPP300-600_AUT 45.7,137 r0 top
C103 "330U" CAPP300-600_AUT 45.7,120.7 r0 top
C104 "82U" CAP_1206 83.6,177.4 r270 top
C105 "68 uF" B32526R3686K000 229.819,182.499 r0 bottom
C106 "68 uF" B32526R3686K000 229.819,135.865 r0 bottom
C107 "68 uF" B32526R3686K000 229.819,90.068 r0 bottom
C108 "82U" CAP_1206 266.9,173.9 r90 top
C109 "82U" CAP_1206 271.4,127.5 r90 top
C110 "82U" CAP_1206 267.7,82.1 r90 top
C111 "1U" CAP_1206 62.4,197.8 r180 top
C112 "1U" CAP_1206 226.4,206.5 r180 top
C113 "1U" CAP_1206 226.7,160.7 r180 top
C114 "1U" CAP_1206 226.6,116 r180 top
C116 "100n" CAP_1206 95.523,88.29 r0 top
C117 "1u" CAP_1206 95.402,85.649 r0 top
C118 "100n" CAP_1206 88.544,85.426 r270 top
C119 "1u" CAP_1206 92.126,85.502 r270 top
C120 "680n" CAP_1206 147.986,84.023 r180 top
C121 "10u" CAP_1206 64.9,122.4 r90 top
C122 "100n" CAP_1206 69,122.4 r90 top
C123 "10u" CAP_1206 93.9,113.4 r90 top
C124 "100n" CAP_1206 89.7,113.4 r90 top
C125 "10u" CAP_1206 66.5,158.6 r90 top
C126 "100n" CAP_1206 70.8,158.6 r90 top
C127 "10u" CAP_1206 94.2,149.4 r90 top
C128 "100n" CAP_1206 98.3,149.4 r90 top
C201A "100n" CAP_1206 67.005,206.934 r270 top (schematic designator C201)
C201B "100n" CAP_1206 218,210.5 r90 top (schematic designator C201)
C201C "100n" CAP_1206 217.4,164.3 r90 top (schematic designator C201)
C201D "100n" CAP_1206 217.9,118.6 r90 top (schematic designator C201)
C301A "100n" CAP_1206 91.3,52.1 r0 top (schematic designator C301)
C301B "100n" CAP_1206 120.2,55 r0 top (schematic designator C301)
C301C "100n" CAP_1206 151.9,53.716 r0 top (schematic designator C301)
C301D "100n" CAP_1206 184.8,52.3 r0 top (schematic designator C301)
C301E "100n" CAP_1206 215.618,52.394 r0 top (schematic designator C301)
C301F "100n" CAP_1206 247.6,51 r0 top (schematic designator C301)
C302A "10u" CAP_1206 91.2,49.6 r0 top (schematic designator C302)
C302B "10u" CAP_1206 120.2,52.3 r0 top (schematic designator C302)
C302C "10u" CAP_1206 151.8,51 r0 top (schematic designator C302)
C302D "10u" CAP_1206 184.8,49.5 r0 top (schematic designator C302)
C302E "10u" CAP_1206 215.6,49.3 r0 top (schematic designator C302)
C302F "10u" CAP_1206 247.7,53.8 r0 top (schematic designator C302)
C303A "100n" RAD-0.2_AUT 113.5,46.6 r270 top (schematic designator C303)
C303B "100n" RAD-0.2_AUT 144.348,48.311 r270 top (schematic designator C303)
C303C "100n" RAD-0.2_AUT 178.4,50.4 r270 top (schematic designator C303)
C303D "100n" RAD-0.2_AUT 211,49.2 r270 top (schematic designator C303)
C303E "100n" RAD-0.2_AUT 242.8,48.2 r270 top (schematic designator C303)
C303F "100n" RAD-0.2_AUT 268.6,46.3 r270 top (schematic designator C303)
C304A "10u" CAP_1206 108.2,45.3 r90 top (schematic designator C304)
C304B "10u" CAP_1206 140.5,48 r90 top (schematic designator C304)
C304C "10u" CAP_1206 174.7,48.3 r90 top (schematic designator C304)
C304D "10u" CAP_1206 207.4,48.1 r90 top (schematic designator C304)
C304E "10u" CAP_1206 238.8,46.9 r90 top (schematic designator C304)
C304F "10u" CAP_1206 263.2,46.1 r90 top (schematic designator C304)
C401 "10u" CAP_1206 39.1,85.547 r0 top
C402 "100n" CAP_1206 39.2,89.747 r0 top
C403 "1u" CAP_1206 36.3,49.5 r90 top
C404 "100n" CAP_1206 33.2,49.5 r90 top
C405 "100n" RAD-0.2_AUT 53.1,49.8 r90 top
C406 "470u" CAPP300-600_AUT 57.9,92.92 r90 bottom
C407 "470u" CAPP300-600_AUT 57.9,71.2 r90 bottom
D302A "1N5819" DIODE0.4_AUT 109.46,54.7 r180 top (schematic designator D302)
D302B "1N5819" DIODE0.4_AUT 137.26,58.4 r180 top (schematic designator D302)
D302C "1N5819" DIODE0.4_AUT 169.8,56.6 r180 top (schematic designator D302)
D302D "1N5819" DIODE0.4_AUT 202.3,55.8 r180 top (schematic designator D302)
D302E "1N5819" DIODE0.4_AUT 233.3,55.8 r180 top (schematic designator D302)
D302F "1N5819" DIODE0.4_AUT 265.5,56.8 r180 top (schematic designator D302)
D303A "1N5819" DIODE0.4_AUT 95.1,64.56 r270 top (schematic designator D303)
D303B "1N5819" DIODE0.4_AUT 123,68.2 r270 top (schematic designator D303)
D303C "1N5819" DIODE0.4_AUT 155.1,67 r270 top (schematic designator D303)
D303D "1N5819" DIODE0.4_AUT 187.6,66.1 r270 top (schematic designator D303)
D303E "1N5819" DIODE0.4_AUT 218.5,66 r270 top (schematic designator D303)
D303F "1N5819" DIODE0.4_AUT 250.6,67.2 r270 top (schematic designator D303)
D401 "1N4007" DIODE0.4_AUT 41.14,57.3 r0 top
L102 "330u" 1140-331K-RC 187.173,149.2 r0 bottom
L103 "330u" 1140-331K-RC 187.731,105.181 r0 bottom
P101 "1217861-1" CONN_1217861-1_TEC 45.3,172.3 r90 top
P102 "1217861-1" CONN_1217861-1_TEC 38.4,100.3 r90 top
P103 "1217861-1" CONN_1217861-1_TEC 268.6,196.3 r90 top
P104 "1217861-1" CONN_1217861-1_TEC 269.2,149.3 r90 top
P105 "1217861-1" CONN_1217861-1_TEC 269.727,103.713 r90 top
P106 "HDR8X2" HDR2X8_AUT 68.68,41 r0 top
P107 "1217861-1" CONN_1217861-1_TEC 80.7,226.5 r180 top
P108 "1217861-1" CONN_1217861-1_TEC 48.5,226.5 r180 top
P109 "1217861-1" CONN_1217861-1_TEC 181.8,226.5 r180 top
P110 "1217861-1" CONN_1217861-1_TEC 146.75,226.4 r180 top
P111 "1217861-1" CONN_1217861-1_TEC 116,225.8 r180 top
P112 "JST 4" PA-4 126.8,38.2 r180 top
P113 "JST 4" PA-4 186.8,35.2 r180 top
P114 "JST 4" PA-4 243.866,35.08 r180 top
Q401 "IPP029N15NM6" TO-220V 70.5,81.2 r90 bottom
Q402 "IPP029N15NM6" TO-220V 70.5,65.4 r90 bottom
R101 "10m" WSL3673R_002-01 55,184 r0 top
R102 "1K8" RES_1206 75.9,174.7 r90 top
R103 "100R" RES_1206 81.1,174.6 r180 top
R104 "8K2" RES_1206 81.2,177.4 r180 top
R105 "10m" WSL3673R_002-01 219.695,192.609 r0 top
R106 "10m" WSL3673R_002-01 219.695,146.509 r0 top
R107 "10m" WSL3673R_002-01 219.695,101.509 r0 top
R109 "0R" RES_1206 169.221,130.785 r180 top
R112 "1K8" RES_1206 258.9,174 r90 top
R113 "8K2" RES_1206 264.3,174 r180 top
R114 "100R" RES_1206 264.3,176.6 r180 top
R115 "1K8" RES_1206 263.3,127.5 r90 top
R116 "8K2" RES_1206 268.5,127.6 r180 top
R117 "100R" RES_1206 268.5,130.3 r180 top
R118 "1K8" RES_1206 259.7,82.1 r90 top
R119 "8K2" RES_1206 265.2,82.2 r180 top
R120 "100R" RES_1206 265.2,84.8 r180 top
R123 "1K" RES_1206 128.9,92.7 r270 top
R124 "1K" RES_1206 124.895,92.677 r270 top
R125 "1K" RES_1206 135,92.6 r270 top
R126 "1K" RES_1206 138.907,92.677 r270 top
R127 "1K" RES_1206 120.9,92.677 r270 top
R128 "1K" RES_1206 116.963,92.6 r270 top
R129 "1K" RES_1206 142.924,92.7 r270 top
R130 "1K" RES_1206 146.914,92.677 r270 top
R131 "1K" RES_1206 133.274,79.381 r270 top
R132 "1K" RES_1206 130.886,79.305 r270 top
R133 "18K2" RES_1206 69.7,113.5 r0 top
R134 "1K8" RES_1206 75.3,116.3 r180 top
R135 "500R" 3296W 82.8,116.3 r180 top
R136 "18K2" RES_1206 72.5,149.2 r0 top
R137 "2K2" RES_1206 78.1,152.4 r180 top
R138 "500R" 3296W 85.6,152.4 r180 top
R139 "0R" RES_1206 275.895,73.304 r90 top
R142 "0R" RES_1206 166.345,126.517 r0 top
R143 "0R" RES_1206 169.018,134.95 r180 top
R303A "100R" RES_1206 101.9,39.8 r0 top (schematic designator R303)
R303B "100R" RES_1206 132.4,43.6 r180 top (schematic designator R303)
R303C "100R" RES_1206 168.2,42.7 r0 top (schematic designator R303)
R303D "100R" RES_1206 200.7,42.1 r180 top (schematic designator R303)
R303E "100R" RES_1206 232.2,40.9 r0 top (schematic designator R303)
R303F "100R" RES_1206 256.7,40.4 r180 top (schematic designator R303)
R304A "12K" RES_1206 111.7,39.9 r0 top (schematic designator R304)
R304B "12K" RES_1206 130.6,41.1 r270 top (schematic designator R304)
R304C "12K" RES_1206 174,42.7 r0 top (schematic designator R304)
R304D "12K" RES_1206 195.5,42.1 r180 top (schematic designator R304)
R304E "12K" RES_1206 237.6,40.8 r0 top (schematic designator R304)
R304F "12K" RES_1206 251.4,40.3 r180 top (schematic designator R304)
R306A "0R" RES_1206 113.1,61.2 r270 top (schematic designator R306)
R306B "0R" RES_1206 140.7,65.2 r270 top (schematic designator R306)
R306C "0R" RES_1206 173.4,65.3 r270 top (schematic designator R306)
R306D "0R" RES_1206 205.2,64.5 r270 top (schematic designator R306)
R306E "0R" RES_1206 236.3,64.6 r270 top (schematic designator R306)
R306F "0R" RES_1206 268.53,64.53 r270 top (schematic designator R306)
R402 "18K2" RES_1206 32.1,83.6 r270 top
R403 "2K2" RES_1206 34.5,78.1 r90 top
R404 "500R" 3296W 33.1,71.207 r90 top
T301A "78602/9C" DIP6W_AUT 97.843,56.903 r0 top (schematic designator T301)
T301B "78602/9C" DIP6W_AUT 125.73,60.403 r0 top (schematic designator T301)
T301C "78602/9C" DIP6W_AUT 158.3,60.7 r0 top (schematic designator T301)
T301D "78602/9C" DIP6W_AUT 190.3,59.7 r0 top (schematic designator T301)
T301E "78602/9C" DIP6W_AUT 220.8,60 r0 top (schematic designator T301)
T301F "78602/9C" DIP6W_AUT 253.8,60.2 r0 top (schematic designator T301)
U101 "AD7328BRUZ" TSSOP20_44 136.018,88.413 r180 top
U102 "LR12K4-G" "D PAK (TO-252-3)" 70.908,127.037 r270 top
U103 "LR12K4-G" "D PAK (TO-252-3)" 73.808,163.037 r270 top
U201A "INA241A3IDR" SOIC8_M 65.6,206.5 r180 top (schematic designator U201)
U201B "INA241A3IDR" SOIC8_M 229.604,215.713 r180 top (schematic designator U201)
U201C "INA241A3IDR" SOIC8_M 229.7,169.5 r180 top (schematic designator U201)
U201D "INA241A3IDR" SOIC8_M 229.8,123.8 r180 top (schematic designator U201)
U301A "FAD7171MX" SOIC8-M 101.7,46 r0 top (schematic designator U301)
U301B "FAD7171MX" SOIC8-M 132.8,48.6 r0 top (schematic designator U301)
U301C "FAD7171MX" SOIC8-M 168,49 r0 top (schematic designator U301)
U301D "FAD7171MX" SOIC8-M 201.1,48.5 r0 top (schematic designator U301)
U301E "FAD7171MX" SOIC8-M 232.1,47.6 r0 top (schematic designator U301)
U301F "FAD7171MX" SOIC8-M 256.7,46.5 r0 top (schematic designator U301)
U401 "LR12K4-G" "D PAK (TO-252-3)" 43.837,82.439 r180 top
U402 "IR2101" DIP8_AUT 39.9,43.4 r0 top

## Footprints (in the part's own frame and the unit in brackets; to place one, negate y for a bottom-side part, rotate by r counter-clockwise, add the part's x,y. Pads: shape width x height; smd on the part's side, far side on the other; paste and mask are expansions set on the pad)
1140-331K-RC [mil] "Lead Spacing = 1.15 in / 1140-331K-RC"
  round 88.31 hole 58.87: 1(-575,0) 2(575,0)
  round 96.5 hole 193 unplated: 3(0,0)
  silkscreen extent -795,-750 750,750, body extent -745,-750 755,750, height 1031
3296W [mil] "3296 - 3/8 ” Square Trimpot, Trimming Potentiometer"
  round 70 hole 25: 1(100,0) 2(-100,0) W(0,0)
  silkscreen extent -197,-95 197,95, body extent -189,-96 186,94, height 458
B32526R3686K000 [mil] "Lead Spacing 1.476\" (37.50mm)"
  rect 71x71 / inner round 60 / far side rect 71x71 hole 51 paste-99999 mask+0: 1(-740,-30)
  round 71 / inner round 60 / far side round 71 hole 51 paste-99999 mask-35.5: 2(736.38,-30)
  silkscreen extent -834,-586 830,526, body extent -827,-582 827,520, height 1673
CAP_1206 [mm] "Body 3.2 x 1.6 mm (LxW typ)"
  rect 1.6x1.8 smd: 1(0,0) 2(2.8,0)
  silkscreen extent 1.1,-0.8 1.7,0.8, body extent -0.15,-0.81 3.05,0.79, height 1.6
CAPP300-600_AUT [mil] "Capacitor, Electrolytic, Radial, Snap-In Pins; Pin Spacing 300 mil; Body 600mil (Dia)"
  rect 100x100 hole 40: 1(0,0)
  round 100 hole 40: 2(-300,0)
  silkscreen extent -450,-300 204,300, body extent -449,-300 153,302, height 107
CONN_1217861-1_TEC [mil] "Pitch = 200 Mil / pad hole size = 77 mil"
  round 77 / inner round 60 / far side round 77 hole 57 paste-99999 mask+0: 1(-95,5) 2(105,5)
  silkscreen extent -196,-62 166,72
"D PAK (TO-252-3)" [mm] "D-PAK,  Body 6.1x6.5mm, Pitch 2.28mm, Lead Span 9.7mm"
  rect 0.95x1.9 smd: 1(1.657,1.492) 3(6.217,1.492)
  rect 6.8x6.9 smd: 2(3.937,7.692)
  silkscreen extent 0.51,1.37 7.29,3.84, body extent 0.64,0.98 7.18,10.92, height 2.34
DIODE0.4_AUT [mil] "Diode, Axial; Body 5.2 x 2.7 mm (LxDia. max), Pin Distance, 400mil"
  rect 80x80 hole 40: A(0,0)
  round 80 hole 40: K(400,0)
  silkscreen extent 40,-50 360,50, body extent -18,-54 416,53, height 107
DIP6W_AUT [mil] "Wide DIL transformer"
  rect 100x62 hole 32: 1(50,281)
  oval 100x62 hole 32: 2(50,181) 3(50,81) 4(455,81) 5(455,181) 6(455,281)
  silkscreen extent 110,11 395,361
DIP8_AUT [mil] "DIP8 100mil pitch, 300mil row."
  rect 96x62 hole 32: 1(52,353)
  oval 96x62 hole 32: 2(52,253) 3(52,153) 4(52,53) 5(352,53) 6(352,153) 7(352,253) 8(352,353)
  silkscreen extent 102,3 302,403, body extent 47,-7 357,423, height 200
HDR2X8_AUT [mil] "Connector; Header; 8x2 Position"
  rect 80x80 hole 35.43: 1(0,0)
  round 80 hole 35.43: 2(0,100) 3(100,0) 4(100,100) 5(200,0) 6(200,100) 7(300,0) 8(300,100) 9(400,0) 10(400,100) 11(500,0) 12(500,100) 13(600,0) 14(600,100) 15(700,0) 16(700,100)
  silkscreen extent -50,-50 750,150, body extent -50,-50 750,150, height 398
PA-4 [mm] "PA Connector (JST), 4 Pins, Pitch 2mm"
  rect 1.4x1.4 hole 0.7: 1(6,0)
  round 1.4 hole 0.7: 2(4,0) 3(2,0) 4(0,0)
  silkscreen extent -2,-3.05 8,2.25, body extent -1.97,-3.12 8.03,2.18, height 7.75
RAD-0.2_AUT [mil] "Indicating Instrument; 2 Leads; Distance 200mil"
  rect 80x80 hole 40: 1(-100,0)
  round 80 hole 40: 2(100,0)
  silkscreen extent -175,-75 175,75, body extent -175,-75 175,75, height 310
RES_1206 [mm] "Body 3.2 x 1.6 mm (LxW typ)"
  rect 1.6x1.8 smd: 1(0,0) 2(2.8,0)
  silkscreen extent 1.14,-0.8 1.65,0.8, body extent -0.21,-0.8 2.96,0.75, height 0.6
SOIC8-M [mm]
  oval 2.8x0.7 smd: 1(-2.596,1.963) 2(-2.596,0.693) 3(-2.596,-0.577) 4(-2.596,-1.847) 5(2.504,-1.847) 6(2.504,-0.577) 7(2.504,0.693) 8(2.504,1.963)
  silkscreen extent -3.17,-2.44 0.75,3.17, body extent -3.11,-2.39 3.02,2.5, height 1.76
SOIC8_M [mm] "SOIC8 General medium width 3-5 mm"
  oval 2.8x0.7 smd: 1(1.904,4.913) 2(1.904,3.643) 3(1.904,2.373) 4(1.904,1.103) 5(7.004,1.103) 6(7.004,2.373) 7(7.004,3.643) 8(7.004,4.913)
  silkscreen extent 1.33,0.51 5.25,6.12, body extent 1.39,0.56 7.52,5.45, height 1.76
TO-220V [mil] "TO, Thru-Hole, Transistor, Vertical, Heatsink Mounted; 3 In-Line Leads; Pitch 2.54 mm"
  oval 75x125 hole 40: 1(-100,0) 2(0,0) 3(100,0)
  silkscreen extent -180,-80 180,100, body extent -204,-59 204,110, height 762
TSSOP20_44 [mil] "TSSOP20 4.4mm SMD DIL"
  round 30 on Top Overlay mask+2.01: 1(19,307)
  rect 70x14 smd paste+0 mask+0: 1(44,272.16) 2(44,246.57) 3(44,220.98) 4(44,195.39) 5(44,169.8) 6(44,144.2) 7(44,118.61) 8(44,93.02) 9(44,67.43) 10(44,41.84) 11(276,41.84) 12(276,67.43) 13(276,93.02) 14(276,118.61) 15(276,144.2) 16(276,169.8) 17(276,195.39) 18(276,220.98) 19(276,246.57) 20(276,272.16)
  silkscreen extent 70,22 250,293, body extent 34,27 286,287, height 47
WSL3673R_002-01 [mil] "Kelvin 4W current Shunt"
  rect 116x300 smd mask+2.01: 1(75,165) 4(369,165)
  rect 116x66 smd mask+2.01: 2(75,372) 3(369,372)
  silkscreen extent 5,5 435,415

## Part data
101 L102 L103: library part 1140-331K-RC, "Power Inductors - Leaded 330uH 10% /  / https://nz.mouser.com/ProductDetail/Bourns/1140-331K-RC?qs=wiQ7G1Lt8gwP8A01VI%2FcoA%3D%3D", ComponentLink1Description="New link", ComponentLink1URL=https://nz.mouser.com/ProductDetail/Bourns/1140-331K-RC?qs=wiQ7G1Lt8gwP8A01VI%2FcoA%3D%3D
C101 C102 C103 C406 C407: library part CAPP300-600, "Polarized Aluminum Capacitor, Through Hole, Pitch 300mil, Body 600mil (Dia)"
C104 C108 C109 C110 C111 C112 C113 C114 C116 C117 C118 C119 C120 C121 C122 C123 C124 C125 C126 C127 C128 C201A C201B C201C C201D C301A C301B C301C C301D C301E C301F C302A C302B C302C C302D C302E C302F C304A C304B C304C C304D C304E C304F C401 C402 C403 C404: library part "CAPN 1206", "Non Polarized Capacitor, SMD, 1206"
C105 C106 C107: library part B32526R3686K000, "68 µF Film Capacitor 160V 250V Polyester, Polyethylene Terephthalate (PET), Metallized Radial /  / https://www.digikey.co.nz/en/products/detail/epcos-tdk-electronics/B32526R3686K000/3490213", ComponentLink1Description="New link", ComponentLink1URL=https://www.digikey.co.nz/en/products/detail/epcos-tdk-electronics/B32526R3686K000/3490213
C303A C303B C303C C303D C303E C303F C405: library part "CAPN RAD0.2", "Non Polarized Capacitor, Multilayer Ceramic Dipped Radial, Pitch 200mil"
D302A D302B D302C D302D D302E D302F D303A D303B D303C D303D D303E D303F: "Schottky Diode, 1A,40v", Supplier Part Number 1=1017589, Supplier 1=Farnell
D401: "Diode, Standard, 1A, 1000v", Supplier Part Number 1=9549129, Supplier 1=Farnell
P101 P102 P103 P104 P105 P107 P108 P109 P110 P111: "250 FASTON,PCB TAB,TCBR / https://tinyurl.com/5c2arff3 /  / https://www.digikey.co.nz/en/products/detail/te-connectivity-amp-connectors/1217861-1/2233479?_gl=1*5eokag*_up*MQ..*_gs*MQ..&gclid=EAIaIQobChMI8b7VmffHjwMVDh6DAx24XBEhEAAYASAAEgLCEPD_BwE&gclsrc=aw.ds&gbraid=0AAAAADrbLlg332VqylSF3zuB8x7hQ-0VQ"
P106: "Header, 8-Pin, Dual row, 2.54mm Pitch, Straight", Supplier Part Number 1=9733620, Supplier 1=Farnell
P112 P113 P114: library part "JST PA Header 4", "JST PA Header, 4-Pin, Pitch 2mm", Supplier Part Number 1=1830737, Supplier 1=Farnell
Q401: library part FQP65N06, "Insulated-Gate Field-Effect Transistor (IGFET), N-Channel, Enhancement, Body Diode, Pin 1 Gate, 2 Drain, 3 Source, 3 Pins- Through Hole TO-220-3"
Q402: library part FQP65N06, "Insulated-Gate Field-Effect Transistor (IGFET), N-Channel, Enhancement, Body Diode, Pin 1 Gate, 2 Drain, 3 Source, 3 Pins - Through Hole TO-220-3"
R101 R105 R106 R107: library part WSL3673R-01, "Current Shunt  / Kelvin 4W 0.002- 0.01"
R102 R103 R104 R109 R112 R113 R114 R115 R116 R117 R118 R119 R120 R123 R124 R125 R126 R127 R128 R129 R130 R131 R132 R133 R134 R136 R137 R139 R142 R143 R303A R303B R303C R303D R303E R303F R304A R304B R304C R304D R304E R304F R306A R306B R306C R306D R306E R306F R402 R403: library part "Resistor 1206", "Resistor, SMD, 1206"
R135 R138 R404: library part 3296W-1-104LF, "3296W Series, 3/8 ” Square Potentiometer, 100k, 10%,  0.5 Watts, Multi Turn /  / Part #: PV36W501C01B00", Supplier Part Number 1=9353194, Supplier 1=Farnell
T301A T301B T301C T301D T301E T301F: "Pulse transformer 1:1:1"
U101: "ADC 12 Bit / Package TSSOP20"
U102 U103 U401: "Adj Positive Regulator  / Linear. 12V dropout V.  / 2W"
U201A U201B U201C U201D: "Current Sense Amplifier 1 Circuit Single-Ended 8-SOIC"
U301A U301B U301C U301D U301E U301F: "High-Side Gate Driver IC Non-Inverting PG-DSO-8 / 8-SOIC (0.154\", 3.90mm Width) / https://www.digikey.co.nz/en/products/detail/onsemi/FAD7171MX/24627314"
U402: library part IR2101_DIP, "Half - Bridge Driver, MOSFET/IGBT, DIP8", Supplier Part Number 1=8638829, Supplier 1=Farnell

## Via types
v1: diameter 1.27, hole 0.762, Top Layer to Bottom Layer, 47 vias
v2: diameter 1.27, hole 0.381, Top Layer to Bottom Layer, 22 vias
v3: diameter 1.27, hole 0.711, Top Layer to Bottom Layer, 6 vias
v4: diameter 5, hole 3, Top Layer to Bottom Layer, 4 vias

## Nets (pads, with @x,y where several pads share a name; then routed paths per layer and width w, separated by ;. In a path a pad name is that pad's centre, name@x,y a point inside that pad or via, vN(x,y) a via of type N, cw(c..) or ccw(c..) an arc to the next point about the centre after c; other vN are vias at no path point)
+3V3: C118.2 C119.2 P106.6 R131.2 R132.2 U101.16 U101.17 | length 147.1
  Top Layer w0.381: 119.112,83.45 U101.17@129.007,83.45 ; 119.553,83.792 119.862,84.1 U101.16@129.007,84.1
  Top Layer w1: v1(86.157,82.423) 86.182,82.398 88.544,82.398 90.844,82.398 118.059,82.398 119.453,83.792 ; v1(125.832,76.403) 125.883,76.455 133.148,76.455 R131.2@133.274,76.581
  Bottom Layer w1: P106.6@73.76,43.54 73.76,70.026 v1(86.157,82.423) 113.868,82.423 119.888,76.403 v1(125.832,76.403)
+10: C127.2 C128.2 C201A.2 C201B.2 C201C.2 C201D.2 R138.2 R138.W U103.2 U201A.3 U201A.6 U201B.3 U201B.6 U201C.3 U201C.6 U201D.3 U201D.6 | length 49
  Top Layer w0.762: U201A.6@58.596,204.127 U201A.3@63.696,204.127 ; U201A.3@64.715,204.13 67.002,204.13 C201A.2@67.005,204.134 67.028,204.111 69.193,204.111 v1(69.215,204.089) ; v1(214.249,167.056) 214.271,167.078 217.378,167.078 217.427,167.127 U201C.6@222.696,167.127 U201C.3@227.796,167.127 ; v1(214.859,213.081) 214.956,213.178 217.878,213.178 218.04,213.34 U201B.6@222.6,213.34 U201B.3@227.7,213.34 ; v1(215.036,121.387) 215.043,121.393 217.893,121.393 217.927,121.427 U201D.6@222.796,121.427 U201D.3@227.896,121.427
  other v2: 91.44,152.4 96.52,152.4 87.63,154.94 90.17,154.94 92.71,154.94 95.25,154.94 97.79,154.94 86.36,157.48 88.9,157.48 91.44,157.48 93.98,157.48 96.52,157.48 87.63,160.02 90.17,160.02 92.71,160.02 95.25,160.02 97.79,160.02 86.36,162.56 88.9,162.56 91.44,162.56 93.98,162.56 96.52,162.56
+10D: C403.2 C404.2 D401.A R404.2 R404.W U401.2 U402.1 | length 0.1
  Top Layer w1: R404.W@33.1,71.207 R404.W@33.1,71.287
+12: C116.2 C117.2 C123.2 C124.2 R135.2 R135.W U101.15 U102.2 | length 15.5
  Top Layer w0.381: 113.475,84.75 U101.15@129.007,84.75
+48: C101.1 C102.1 C103.1 C121.2 C122.2 C125.2 C126.2 C401.2 C402.2 C406.1 P101.1 P101.2 Q401.2 R101.1 U102.1 U103.1 U401.1